# EAGLE board schemaPCB (EAGLE 9.7.0)
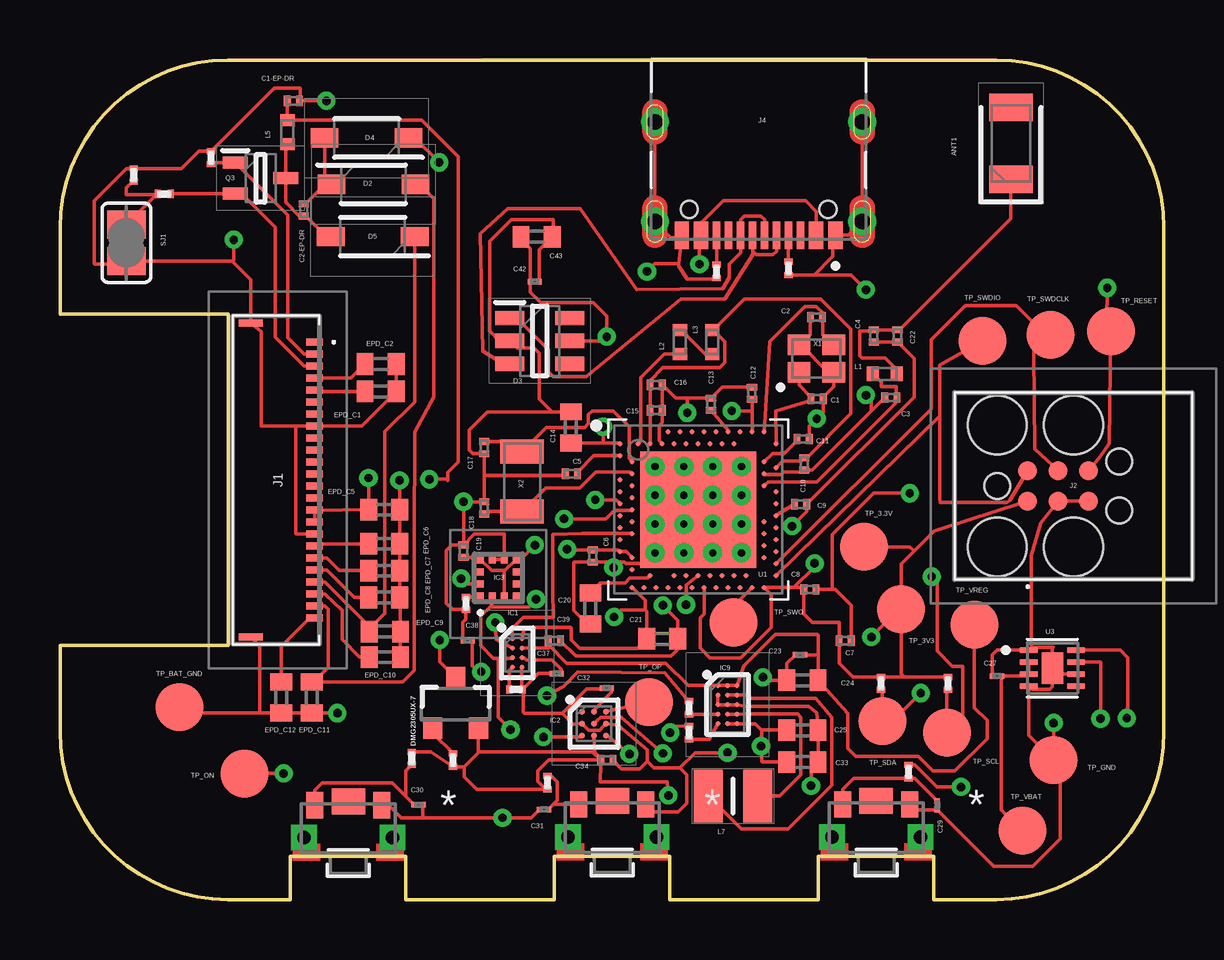
[diagram p0: board, top side]
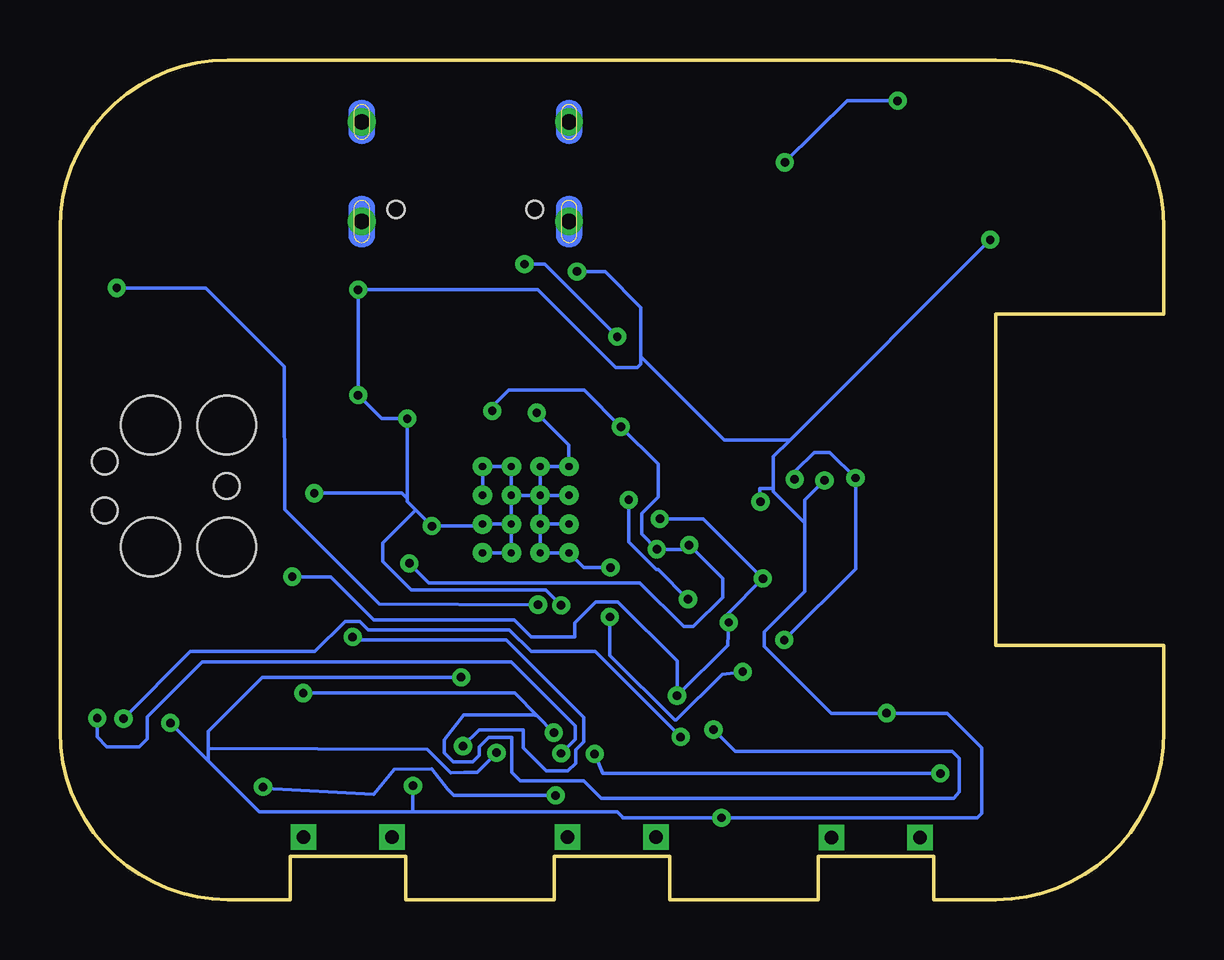
[diagram p1: board, bottom side, seen from below]

Size 46 x 35 mm. Coordinates in mm from the lower left corner, seen from the top.
Outline: 39,35 arc-90 46,28
Outline: 46,7 arc-90 39,0
Outline: 7,35 arc90 0,28
Outline: 0,7 arc90 7,0
Outline: 7,35 arc90 0,28
Outline: 0,28 0,24.4 7,24.4 7,10.6 0,10.6 0,7
Outline: 0,7 arc90 7,0
Outline: 7,0 9.6,0 9.6,1.8 14.4,1.8 14.4,0 20.6,0 20.6,1.8 25.4,1.8 25.4,0 31.6,0 31.6,1.8 36.4,1.8 36.4,0 39,0
Outline: 39,0 arc90 46,7
Outline: 46,7 46,28
Outline: 46,28 arc90 39,35
Outline: 39,35 7,35
Copper layers (1*16): Top 0.035mm / dielectric 1.5mm / Bottom 0.035mm
Design rules "Fusion Electronics Design Rules *": minimum track width 6mil, minimum drill 0.35mm, track to track 6mil, track to pad 6mil, pad to pad 6mil, via to via 6mil, smd to smd 6mil, copper to edge 40mil, drill to drill 6mil, minimum pad ring 10mil, minimum via ring 8mil, stop-mask expansion 4mil, vias tented up to drill 9999mil, thermal gap 10mil

## Footprints (pad centres in the part's own frame; a part is rotated, then mirrored left to right if it is on the bottom)
2450AT18B100E_ANTC3216X140N = smd 1.15 x 1.8: 1 -1.5,0; 2 1.5,0
NORDIC_NRF_3_RESC0201_L = smd 0.28 x 0.43: 1 -0.255,0; 2 0.255,0
ESP32_C6_LIBRARY_1_ESP32_WROVER_EAGLE-LTSPICE_C0402 = smd 0.7 x 0.9: 1 -0.65,0; 2 0.65,0
GRM011R60J152KE01L_2_CAPC0201X13N = smd 0.22 x 0.23: 1 -0.185,0; 2 0.185,0
ESP32_C6_LIBRARY_5_SOD3716X135N = smd 1.15 x 0.8: 1 -1.75,0; 2 1.75,0
ESP32_C6_LIBRARY_3_SOT95P280X145-6N = smd 1.2 x 0.6: 1 -1.25,0.95; 2 -1.25,0; 3 -1.25,-0.95; 4 1.25,-0.95; 5 1.25,0; 6 1.25,0.95
ESP32_C6_LIBRARY_4_ESP32_C6_LIBRARY_4_ESP32_C6_LIBRARY_4_ESP32_C6_LIBRARY_4_ESP32_WROVER_SPARKFUN-DISCRETESEMI_SOT23-3 = smd 0.8 x 0.9: 1 -0.95,-1; 2 0.95,-1; 3 0,1.1
BQ25180YBGR_BGA8C40P2X4_100X155X50 = smd 0.2 x 0.2: A1 -0.2,0.6; A2 0.2,0.6; B1 -0.2,0.2; B2 0.2,0.2; C1 -0.2,-0.2; C2 0.2,-0.2; D1 -0.2,-0.6; D2 0.2,-0.6
DRV2605YZFR_BGA9C50P3X3_144X144X62 = smd 0.25 x 0.25: A1 -0.5,0.5; A2 0,0.5; A3 0.5,0.5; B1 -0.5,0; B2 0,0; B3 0.5,0; C1 -0.5,-0.5; C2 0,-0.5; C3 0.5,-0.5
BMA423_BMA423 = smd 0.3 x 0.35: 1 -0.75,-0.775; 2 -0.25,-0.775; 3 0.25,-0.775; 4 0.75,-0.775; 7 0.75,0.775; 8 0.25,0.775; 9 -0.25,0.775; 10 -0.75,0.775 | smd 0.35 x 0.3: 5 0.775,-0.25; 6 0.775,0.25; 11 -0.775,0.25; 12 -0.775,-0.25
RT6160AWSC_BGA15C40P3X5_140X230X60 = smd 0.216 x 0.216: A1 -0.4,0.8; A2 0,0.8; A3 0.4,0.8; B1 -0.4,0.4; B2 0,0.4; B3 0.4,0.4; C1 -0.4,0; C2 0,0; C3 0.4,0; D1 -0.4,-0.4; D2 0,-0.4; D3 0.4,-0.4; E1 -0.4,-0.8; E2 0,-0.8; E3 0.4,-0.8
503480-2400_5034802400 = smd 0.3 x 0.7: 1 -5.75,1.525; 2 -5.25,1.525; 3 -4.75,1.525; 4 -4.25,1.525; 5 -3.75,1.525; 6 -3.25,1.525; 7 -2.75,1.525; 8 -2.25,1.525; 9 -1.75,1.525; 10 -1.25,1.525; 11 -0.75,1.525; 12 -0.25,1.525; 13 0.25,1.525; 14 0.75,1.525; 15 1.25,1.525; 16 1.75,1.525; 17 2.25,1.525; 18 2.75,1.525; 19 3.25,1.525; 20 3.75,1.525; 21 4.25,1.525; 22 4.75,1.525; 23 5.25,1.525; 24 5.75,1.525 | smd 0.3 x 1: MP1 -6.54,-1.125; MP2 6.54,-1.125
TC2030-IDC_TC2030IDC = smd 0.783 x 0.783: 1 -0.953,-0.635; 2 -0.953,0.635; 3 0.317,-0.635; 4 0.317,0.635; 5 1.588,-0.635; 6 1.588,0.635 | hole 2.451: -2.223,-2.54; -2.223,2.54; 0.952,-2.54; 0.952,2.54 | hole 1.067: -2.223,0; 2.857,-1.016; 2.857,1.016
KH-TYPE-C-16P_KINGHELM_KH-TYPE-C-16P = smd 0.6 x 1.15: A1_B12 -3.2,4.725; A4_B9 -2.4,4.725; A9_B4 2.4,4.725; A12_B1 3.2,4.725 | smd 0.3 x 1.15: A5 -1.25,4.725; A6 -0.25,4.725; A7 0.25,4.725; A8 1.25,4.725; B5 1.75,4.725; B6 0.75,4.725; B7 -0.75,4.725; B8 -1.75,4.725 | drill 0.65 pad 1.05: SH1 -4.32,0; SH2 4.32,0; SH3 -4.32,4.15; SH4 4.32,4.15 | hole 0.7: -2.89,3.65; 2.89,3.65
NORDIC_NRF_2_RESC0402_L = smd 0.5 x 0.6: 1 -0.5,0; 2 0.5,0
MLP2016SR47MT0S1_INDC2016X100N = smd 1.2 x 2.2: 1 -1.028,0; 2 1.028,0
ESP32_C6_LIBRARY_6_SOT65P210X110-3N = smd 1.05 x 0.5: 1 -1.05,0.65; 2 -1.05,-0.65; 3 1.05,0
ERA-1AEB3401C_0201 = smd 0.35 x 0.25: 1 0,0.275; 2 0,-0.275
CPF0201D7K68C1_0201 = smd 0.35 x 0.25: 1 0,0.275; 2 0,-0.275
ESP32_C6_LIBRARY_7_JUMPER_SJ = smd 1.168 x 1.6: 1 -0.762,0; 2 0.762,0
2025-10-22_07-23-44_LIBRARY_SW_EVP-AKE31A_PAN = smd 0.711 x 1.092: 1 -1.4,-0.972; 2 1.4,-0.972 | drill 0.559 pad 0.914 square: 3 -1.848,0.381; 4 1.848,0.381 | smd 1.397 x 1.092: 5 0,-1.124
HECTOR_WATCH_1_TP20R = smd 2 x 2: TP 0,0
NORDIC_NRF_4_AQFN50P700X700X85_HS-74N = smd 4.85 x 4.85: P$74 0,0 | drill 0.3 pad 0.6: P$75 -1.8,1.8; P$76 -0.6,1.8; P$77 0.6,1.8; P$78 1.8,1.8; P$79 -1.8,0.6; P$80 -0.6,0.6; P$81 0.6,0.6; P$82 1.8,0.6; P$83 -1.8,-0.6; P$84 -0.6,-0.6; P$85 0.6,-0.6; P$86 1.8,-0.6; P$87 -1.8,-1.8; P$88 -0.6,-1.8; P$89 0.6,-1.8; P$90 1.8,-1.8 | smd 0.2 x 0.2: P$A8 -1.25,3.25; P$A10 -0.75,3.25; P$A12 -0.25,3.25; P$A14 0.25,3.25; P$A16 0.75,3.25; P$A18 1.25,3.25; P$A20 1.75,3.25; P$A22 2.25,3.25; P$A23 2.75,3.25; P$AA24 3.25,-2.25; P$AB2 -2.75,-2.5; P$AC5 -2,-2.75; P$AC9 -1,-2.75; P$AC11 -0.5,-2.75; P$AC13 0,-2.75; P$AC15 0.5,-2.75; P$AC17 1,-2.75; P$AC19 1.5,-2.75; P$AC21 2,-2.75; P$AC24 3.25,-2.75; P$AD2 -2.75,-3.25; P$AD4 -2.25,-3.25; P$AD6 -1.75,-3.25; P$AD8 -1.25,-3.25; P$AD10 -0.75,-3.25; P$AD12 -0.25,-3.25; P$AD14 0.25,-3.25; P$AD16 0.75,-3.25; P$AD18 1.25,-3.25; P$AD20 1.75,-3.25; P$AD22 2.25,-3.25; P$AD23 2.75,-3.25; P$B1 -3.25,2.75; P$B3 -2.5,2.75; P$B5 -2,2.75; P$B7 -1.5,2.75; P$B9 -1,2.75; P$B11 -0.5,2.75; P$B13 0,2.75; P$B15 0.5,2.75; P$B17 1,2.75; P$B19 1.5,2.75; P$B24 3.25,2.75; P$C1 -3.25,2.25; P$D2 -2.75,2; P$D23 2.75,2; P$E24 3.25,1.75; P$F2 -2.75,1.5; P$F23 2.75,1.5; P$G1 -3.25,1.25; P$H2 -2.75,1; P$H23 2.75,1; P$J1 -3.25,0.75; P$J24 3.25,0.75; P$K2 -2.75,0.5; P$L1 -3.25,0.25; P$L24 3.25,0.25; P$M2 -2.75,0; P$N1 -3.25,-0.25; P$N24 3.25,-0.25; P$P2 -2.75,-0.5; P$P23 2.75,-0.5; P$R1 -3.25,-0.75; P$R24 3.25,-0.75; P$T2 -2.75,-1; P$T23 2.75,-1; P$U1 -3.25,-1.25; P$U24 3.25,-1.25; P$V23 2.75,-1.5; P$W1 -3.25,-1.75; P$W24 3.25,-1.75; P$Y2 -2.75,-2; P$Y23 2.75,-2
ESP32_C6_LIBRARY_SON50P200X200X80-9N = smd 0.76 x 0.27: 1 -0.985,0.75; 2 -0.985,0.25; 3 -0.985,-0.25; 4 -0.985,-0.75; 5 0.985,-0.75; 6 0.985,-0.25; 7 0.985,0.25; 8 0.985,0.75 | smd 0.9 x 1.3: 9 0,0
NORDIC_NRF_BT-XTAL_2016_N = smd 0.95 x 0.85: 1 -0.725,-0.575; 2 0.725,-0.575; 3 0.725,0.575; 4 -0.725,0.575
NORDIC_NRF_1_XTAL_3215_N = smd 1 x 1.8: 1 -1.25,0; 2 1.25,0

## Placement (x,y rotation side)
ANT1  2450AT18B100E  [2450AT18B100E_ANTC3216X140N]  39.62,31.52 90 top
C1  12pF  [NORDIC_NRF_3_RESC0201_L]  31.55,20.87 0 top
C1-EP-DR  10uF  [NORDIC_NRF_3_RESC0201_L]  9.73,33.3 0 top
C2  12pF  [NORDIC_NRF_3_RESC0201_L]  31.52,24.28 180 top
C2-EP-DR  4.7uF/25V  [NORDIC_NRF_3_RESC0201_L]  10.16,28.75 270 top
C3  1pF  [NORDIC_NRF_3_RESC0201_L]  34.62,20.93 180 top
C4  1pF  [NORDIC_NRF_3_RESC0201_L]  33.91,23.49 270 top
C5  100nF  [NORDIC_NRF_3_RESC0201_L]  21.31,17.75 180 top
C6  4.7µF  [NORDIC_NRF_3_RESC0201_L]  22.2,14.32 270 top
C7  100nF  [NORDIC_NRF_3_RESC0201_L]  32.71,10.79 0 top
C8  100nF  [NORDIC_NRF_3_RESC0201_L]  31.24,12.92 0 top
C9  820pF  [NORDIC_NRF_3_RESC0201_L]  30.86,16.48 0 top
C10  N.C.  [NORDIC_NRF_3_RESC0201_L]  31.01,18.16 270 top
C11  100pF  [NORDIC_NRF_3_RESC0201_L]  30.96,19.2 0 top
C12  100nF  [NORDIC_NRF_3_RESC0201_L]  28.83,21.1 90 top
C13  N.C.  [NORDIC_NRF_3_RESC0201_L]  27.13,20.65 90 top
C14  4.7µF  [ESP32_C6_LIBRARY_1_ESP32_WROVER_EAGLE-LTSPICE_C0402]  21.28,19.68 90 top
C15  1.0µF  [NORDIC_NRF_3_RESC0201_L]  24.84,20.39 0 top
C16  47nF  [NORDIC_NRF_3_RESC0201_L]  24.84,21.46 0 top
C17  12pF  [NORDIC_NRF_3_RESC0201_L]  17.68,18.84 90 top
C18  12pF  [NORDIC_NRF_3_RESC0201_L]  17.68,16.33 90 top
C19  100nF  [NORDIC_NRF_3_RESC0201_L]  16.81,14.52 90 top
C20  4.7µF  [ESP32_C6_LIBRARY_1_ESP32_WROVER_EAGLE-LTSPICE_C0402]  22.1,12.14 270 top
C21  4.7µF  [ESP32_C6_LIBRARY_1_ESP32_WROVER_EAGLE-LTSPICE_C0402]  25.09,10.87 0 top
C22  N.C.  [NORDIC_NRF_3_RESC0201_L]  34.9,23.49 270 top
C23  0.1uF  [GRM011R60J152KE01L_2_CAPC0201X13N]  30.83,10.21 180 top
C24  10uF  [ESP32_C6_LIBRARY_1_ESP32_WROVER_EAGLE-LTSPICE_C0402]  30.94,9.14 0 top
C25  22uF  [ESP32_C6_LIBRARY_1_ESP32_WROVER_EAGLE-LTSPICE_C0402]  30.94,7.06 0 top
C27  0.1uF  [GRM011R60J152KE01L_2_CAPC0201X13N]  39.04,9.32 0 top
C29  1uF  [GRM011R60J152KE01L_2_CAPC0201X13N]  36.55,3.93 90 top
C30  1uF  [GRM011R60J152KE01L_2_CAPC0201X13N]  14.93,3.96 180 top
C31  1uF  [GRM011R60J152KE01L_2_CAPC0201X13N]  20.17,3.76 0 top
C32  1uF  [GRM011R60J152KE01L_2_CAPC0201X13N]  22.78,8.81 0 top
C33  22uF  [ESP32_C6_LIBRARY_1_ESP32_WROVER_EAGLE-LTSPICE_C0402]  30.94,5.74 0 top
C34  0.1uF  [NORDIC_NRF_3_RESC0201_L]  22.78,5.81 0 top
C37  1uF  [GRM011R60J152KE01L_2_CAPC0201X13N]  20.7,9.42 0 top
C38  1uF  [GRM011R60J152KE01L_2_CAPC0201X13N]  16.99,10.79 0 top
C39  10uF  [NORDIC_NRF_3_RESC0201_L]  20.6,10.79 0 top
C42  0.1uF  [GRM011R60J152KE01L_2_CAPC0201X13N]  19.79,25.75 0 top
C43  4.7uF  [ESP32_C6_LIBRARY_1_ESP32_WROVER_EAGLE-LTSPICE_C0402]  19.86,27.63 0 top
D2  ESP32_C6_LIBRARY_5_MBR0530  [ESP32_C6_LIBRARY_5_SOD3716X135N]  13.05,29.82 0 top
D3  USBLC6-2SC6Y  [ESP32_C6_LIBRARY_3_SOT95P280X145-6N]  19.99,23.29 0 top
D4  ESP32_C6_LIBRARY_5_MBR0530  [ESP32_C6_LIBRARY_5_SOD3716X135N]  12.78,31.75 180 top
D5  ESP32_C6_LIBRARY_5_MBR0530  [ESP32_C6_LIBRARY_5_SOD3716X135N]  13.03,27.63 180 top
DMG2305UX-7  20V/4.2A/52mΩ/1.4W  [ESP32_C6_LIBRARY_4_ESP32_C6_LIBRARY_4_ESP32_C6_LIBRARY_4_ESP32_C6_LIBRARY_4_ESP32_WROVER_SPARKFUN-DISCRETESEMI_SOT23-3]  16.48,8.15 0 top
EPD_C1  1uF/50V  [ESP32_C6_LIBRARY_1_ESP32_WROVER_EAGLE-LTSPICE_C0402]  13.36,21.18 180 top
EPD_C2  1uF/50V  [ESP32_C6_LIBRARY_1_ESP32_WROVER_EAGLE-LTSPICE_C0402]  13.36,22.32 180 top
EPD_C5  0.1uF/50V  [ESP32_C6_LIBRARY_1_ESP32_WROVER_EAGLE-LTSPICE_C0402]  13.51,16.25 180 top
EPD_C6  1uF/50V  [ESP32_C6_LIBRARY_1_ESP32_WROVER_EAGLE-LTSPICE_C0402]  13.51,14.83 180 top
EPD_C7  1uF/50V  [ESP32_C6_LIBRARY_1_ESP32_WROVER_EAGLE-LTSPICE_C0402]  13.51,13.71 180 top
EPD_C8  1uF/50V  [ESP32_C6_LIBRARY_1_ESP32_WROVER_EAGLE-LTSPICE_C0402]  13.51,12.59 180 top
EPD_C9  1uF/50V  [ESP32_C6_LIBRARY_1_ESP32_WROVER_EAGLE-LTSPICE_C0402]  13.54,11.17 180 top
EPD_C10  1uF/50V  [ESP32_C6_LIBRARY_1_ESP32_WROVER_EAGLE-LTSPICE_C0402]  13.54,10.11 180 top
EPD_C11  1uF/50V  [ESP32_C6_LIBRARY_1_ESP32_WROVER_EAGLE-LTSPICE_C0402]  10.49,8.43 90 top
EPD_C12  1uF/50V  [ESP32_C6_LIBRARY_1_ESP32_WROVER_EAGLE-LTSPICE_C0402]  9.22,8.43 90 top
IC1  BQ25180YBGR  [BQ25180YBGR_BGA8C40P2X4_100X155X50]  19.05,10.28 0 top
IC2  DRV2605YZFR  [DRV2605YZFR_BGA9C50P3X3_144X144X62]  22.25,7.34 0 top
IC3  BMA421  [BMA423_BMA423]  18.26,13.41 0 top
IC9  RT6160AWSC  [RT6160AWSC_BGA15C40P3X5_140X230X60]  27.81,8.12 0 top
J1  503480-2400  [503480-2400_5034802400]  9.08,17.49 270 top
J2  TC2030-IDC  [TC2030-IDC_TC2030IDC]  41.27,17.24 0 top
J4  KH-TYPE-C-16P  [KH-TYPE-C-16P_KINGHELM_KH-TYPE-C-16P]  29.11,32.42 180 top
L1  3.9nH  [NORDIC_NRF_2_RESC0402_L]  34.37,21.92 0 top
L2  10µH  [NORDIC_NRF_2_RESC0402_L]  25.83,23.24 90 top
L3  15nH  [NORDIC_NRF_2_RESC0402_L]  27.18,23.24 90 top
L5  68uH  [NORDIC_NRF_2_RESC0402_L]  9.47,32 270 top
L7  FTC252012SR47MBCA  [MLP2016SR47MT0S1_INDC2016X100N]  28.04,4.31 0 top
Q3  SI1308EDL-T1-GE3  [ESP32_C6_LIBRARY_6_SOT65P210X110-3N]  8.36,30.07 0 top
R1_EP_DR  0.47  [ERA-1AEB3401C_0201]  4.34,29.41 90 top
R1_USB  5K1  [CPF0201D7K68C1_0201]  30.35,26.31 180 top
R2  0  [CPF0201D7K68C1_0201]  26.21,6.96 0 top
R2_EP_DR  10K  [ERA-1AEB3401C_0201]  6.3,30.93 0 top
R2_USB  5K1  [ERA-1AEB3401C_0201]  27.35,26.18 0 top
R3  0  [ERA-1AEB3401C_0201]  16.92,12.34 180 top
R4  0  [CPF0201D7K68C1_0201]  26.21,8 0 top
R5  10k  [CPF0201D7K68C1_0201]  14.65,5.89 180 top
R7  10k  [CPF0201D7K68C1_0201]  35.36,5.33 180 top
R8  10k  [CPF0201D7K68C1_0201]  20.32,4.87 0 top
R9  10K  [ERA-1AEB3401C_0201]  19,8.76 270 top
R17  3K3  [CPF0201D7K68C1_0201]  37.01,9.01 0 top
R18  3K3  [CPF0201D7K68C1_0201]  34.21,9.01 0 top
R_PWR_EPD  10K  [CPF0201D7K68C1_0201]  16.38,5.81 0 top
R_TYPE_SEL  2.2  [ERA-1AEB3401C_0201]  3.07,30.2 0 top
SJ1  [ESP32_C6_LIBRARY_7_JUMPER_SJ]  2.77,27.38 90 top
SW_DN  2025-10-22_07-23-44_LIBRARY_EVP-AKE31ASW_EVP-AKE31A_PAN  [2025-10-22_07-23-44_LIBRARY_SW_EVP-AKE31A_PAN]  34.01,2.99 180 top
SW_ENT  2025-10-22_07-23-44_LIBRARY_EVP-AKE31ASW_EVP-AKE31A_PAN  [2025-10-22_07-23-44_LIBRARY_SW_EVP-AKE31A_PAN]  23.01,2.99 180 top
SW_UP  2025-10-22_07-23-44_LIBRARY_EVP-AKE31ASW_EVP-AKE31A_PAN  [2025-10-22_07-23-44_LIBRARY_SW_EVP-AKE31A_PAN]  12.01,2.97 180 top
TP_3.3V  HECTOR_WATCH_1_TPTP20R  [HECTOR_WATCH_1_TP20R]  33.5,14.7 0 top
TP_3V3  HECTOR_WATCH_1_TPTP20R  [HECTOR_WATCH_1_TP20R]  35.05,12.11 0 top
TP_BAT_GND  HECTOR_WATCH_1_TPTP20R  [HECTOR_WATCH_1_TP20R]  4.98,8.02 0 top
TP_GND  HECTOR_WATCH_1_TPTP20R  [HECTOR_WATCH_1_TP20R]  41.4,5.81 0 top
TP_ON  HECTOR_WATCH_1_TPTP20R  [HECTOR_WATCH_1_TP20R]  7.7,5.25 0 top
TP_OP  HECTOR_WATCH_1_TPTP20R  [HECTOR_WATCH_1_TP20R]  24.54,8.23 0 top
TP_RESET  HECTOR_WATCH_1_TPTP20R  [HECTOR_WATCH_1_TP20R]  43.79,23.69 0 top
TP_SCL  HECTOR_WATCH_1_TPTP20R  [HECTOR_WATCH_1_TP20R]  36.96,6.96 0 top
TP_SDA  HECTOR_WATCH_1_TPTP20R  [HECTOR_WATCH_1_TP20R]  34.26,7.44 0 top
TP_SWDCLK  HECTOR_WATCH_1_TPTP20R  [HECTOR_WATCH_1_TP20R]  41.27,23.54 0 top
TP_SWDIO  HECTOR_WATCH_1_TPTP20R  [HECTOR_WATCH_1_TP20R]  38.43,23.29 0 top
TP_SWO  HECTOR_WATCH_1_TPTP20R  [HECTOR_WATCH_1_TP20R]  28.07,11.55 0 top
TP_VBAT  HECTOR_WATCH_1_TPTP20R  [HECTOR_WATCH_1_TP20R]  40.11,2.87 0 top
TP_VREG  HECTOR_WATCH_1_TPTP20R  [HECTOR_WATCH_1_TP20R]  38.1,11.45 0 top
U1  NRF52840_QF  [NORDIC_NRF_4_AQFN50P700X700X85_HS-74N]  26.59,16.25 0 top
U3  MAX17048G+T10  [ESP32_C6_LIBRARY_SON50P200X200X80-9N]  41.35,9.65 0 top
X1  32MHz  [NORDIC_NRF_BT-XTAL_2016_N]  31.52,22.55 0 top
X2  32.768kHz  [NORDIC_NRF_1_XTAL_3215_N]  19.25,17.42 90 top

## Library data of the parts
ANT1 = InkTime_v5 (1); ARROW_PART_NUMBER: 2450AT18B100E; ARROW_PRICE-STOCK: https://www.arrow.com/en/products/2450at18b100e/johanson-dielectrics?utm_currency=USD&region=nac; DESCRIPTION: Antennas 2.45GHz ANTENNA; HEIGHT: 1.4mm; MANUFACTURER_NAME: JOHANSON TECHNOLOGY; MANUFACTURER_PART_NUMBER: 2450AT18B100E; MOUSER_PART_NUMBER: 609-2450AT18B100E; MOUSER_PRICE-STOCK: https://www.mouser.co.uk/ProductDetail/Johanson-Technology/2450AT18B100E?qs=yCnrNFeXz%252Bh5MFsFIXGZGA%3D%3D
C1 C1-EP-DR C2 C2-EP-DR C3-C13 C15-C19 C22 C34 C39 L1-L3 L5 R1_EP_DR R1_USB R2 R2_EP_DR R2_USB R3-R5 R7-R9 R17 R18 R_PWR_EPD R_TYPE_SEL SJ1 TP_3.3V TP_3V3 TP_BAT_GND TP_GND TP_ON TP_OP TP_RESET TP_SCL TP_SDA TP_SWDCLK TP_SWDIO TP_SWO TP_VBAT TP_VREG U1 X1 X2 = InkTime_v5 (1)
C14 C20 C21 C24 C25 C33 C43 EPD_C1 EPD_C2 EPD_C5-EPD_C12 = InkTime_v5 (1); SPICEMODEL: NONE; SPICEPREFIX: C
C23 C27 C29-C32 C37 C38 C42 = InkTime_v5 (1); AVAILABILITY: In Stock; CHECK_PRICES: https://www.snapeda.com/parts/GRM011R60J152KE01L/Murata/view-part/?ref=eda; DESCRIPTION: SMD Capacitor X5R(EIA) with Capacitance: 1500pF Tol. 10%. Rated Voltage: 6.3Vdc; MF: Murata; MP: GRM011R60J152KE01L; PACKAGE: 0201 Murata; PRICE: None; SNAPEDA_LINK: https://www.snapeda.com/parts/GRM011R60J152KE01L/Murata/view-part/?ref=snap
D2 D4 D5 = InkTime_v5 (1); AVAILABILITY: In Stock; CHECK_PRICES: https://www.snapeda.com/parts/MBR0530/Onsemi/view-part/?ref=eda; DESCRIPTION: Diode Schottky 30 V 500mA Surface Mount SOD-123; MF: ON Semiconductor; MP: MBR0530; PACKAGE: SOD-123-2 ON Semiconductor; PRICE: None; PURCHASE-URL: https://www.snapeda.com/api/url_track_click_mouser/?unipart_id=179458&manufacturer=ON Semiconductor&part_name=MBR0530&search_term=None; SNAPEDA_LINK: https://www.snapeda.com/parts/MBR0530/Onsemi/view-part/?ref=snap
D3 = InkTime_v5 (1); AVAILABILITY: In Stock; CHECK_PRICES: https://www.snapeda.com/parts/USBLC6-2SC6Y/STMicroelectronics/view-part/?ref=eda; DESCRIPTION: 17V Clamp 5A (8/20µs) Ipp Tvs Diode Surface Mount SOT-23-6; MF: STMicroelectronics; MP: USBLC6-2SC6Y; PACKAGE: SOT-23-6 STMicroelectronics; PRICE: None; SNAPEDA_LINK: https://www.snapeda.com/parts/USBLC6-2SC6Y/STMicroelectronics/view-part/?ref=snap
DMG2305UX-7 = InkTime_v5 (1); PROD_ID: TRAN-14388
IC1 = InkTime_v5 (1); ARROW_PART_NUMBER: BQ25180YBGR; ARROW_PRICE-STOCK: https://www.arrow.com/en/products/bq25180ybgr/texas-instruments?utm_currency=USD&region=nac; DESCRIPTION: Charger IC Lithium Ion/Polymer, Lithium Iron Phosphate 8-DSBGA (1.6x1.1); HEIGHT: 0.5mm; MANUFACTURER_NAME: Texas Instruments; MANUFACTURER_PART_NUMBER: BQ25180YBGR; MOUSER_PART_NUMBER: 595-BQ25180YBGR; MOUSER_PRICE-STOCK: https://www.mouser.co.uk/ProductDetail/Texas-Instruments/BQ25180YBGR?qs=doiCPypUmgEWjAK%252BJAX6Tw%3D%3D
IC2 = InkTime_v5 (1); ARROW_PART_NUMBER: DRV2605YZFR; ARROW_PRICE-STOCK: https://www.arrow.com/en/products/drv2605yzfr/texas-instruments?region=nac; DESCRIPTION: Haptic Driver for ERM/LRA with Built-In Library and Smart Loop Architecture; HEIGHT: 0.625mm; MANUFACTURER_NAME: Texas Instruments; MANUFACTURER_PART_NUMBER: DRV2605YZFR
IC3 = InkTime_v5 (1); ARROW_PART_NUMBER: BMA423; ARROW_PRICE-STOCK: https://www.arrow.com/en/products/bma423/bosch; DESCRIPTION: Accelerometers Triaxial low-g 12bit Acceleration Sensor; HEIGHT: 1mm; MANUFACTURER_NAME: BOSCH; MANUFACTURER_PART_NUMBER: BMA423; MOUSER_PART_NUMBER: 262-BMA423; MOUSER_PRICE-STOCK: https://www.mouser.co.uk/ProductDetail/Bosch-Sensortec/BMA423?qs=HXFqYaX1Q2xC%252BSgeGoX3mg%3D%3D
IC9 = InkTime_v5 (1); DESCRIPTION: Buck-Boost Regulator Positive Output Step-Up/Step-Down I2C DC-DC Controller IC 15-WL-CSP (BSC) (1.4x2.3); HEIGHT: 0.6mm; MANUFACTURER_NAME: RICHTEK; MANUFACTURER_PART_NUMBER: RT6160AWSC; MOUSER_PART_NUMBER: 835-RT6160AWSC; MOUSER_PRICE-STOCK: https://www.mouser.co.uk/ProductDetail/Richtek/RT6160AWSC?qs=amGC7iS6iy%2FLd9PSoixZXQ%3D%3D
J1 = InkTime_v5 (1); DESCRIPTION: FFC & FPC Connectors 0.5mm FPC RA SMT Dual Contact 24Ckt; HEIGHT: 1.87mm; MANUFACTURER_NAME: Molex; MANUFACTURER_PART_NUMBER: 503480-2400; MOUSER_PART_NUMBER: 538-503480-2400; MOUSER_PRICE-STOCK: https://www.mouser.co.uk/ProductDetail/Molex/503480-2400?qs=OAhjpuo3Vu7efIoxFh9AOw%3D%3D
J2 = InkTime_v5 (1); DESCRIPTION: CABLE ADAPTER 6 POS; HEIGHT: 19mm; MANUFACTURER_NAME: Tag Connect; MANUFACTURER_PART_NUMBER: TC2030-IDC
J4 = InkTime_v5 (1); AVAILABILITY: Not in stock; CHECK_PRICES: https://www.snapeda.com/parts/KH-TYPE-C-16P/Kinghelm/view-part/?ref=eda; MF: kinghelm; MP: KH-TYPE-C-16P; PACKAGE: None; PRICE: None; SNAPEDA_LINK: https://www.snapeda.com/parts/KH-TYPE-C-16P/Kinghelm/view-part/?ref=snap
L7 = InkTime_v5 (1); DESCRIPTION: SMD / SMT Inductors (Coils), L=0.47?H, L x W x T :; HEIGHT: 1mm; JLCPCB: https://jlcpcb.com/partdetail/6763488-FTC252012SR47MBCA/C5832368; MANUFACTURER_NAME: TDK; MANUFACTURER_PART_NUMBER: FTC252012SR47MBCA
Q3 = InkTime_v5 (1); AVAILABILITY: In Stock; CHECK_PRICES: https://www.snapeda.com/parts/SI1308EDL-T1-GE3/Vishay+Siliconix/view-part/?ref=eda; DESCRIPTION: Si1308EDL-T1-GE3 N-channel MOSFET Transistor, 1.5 A, 30 V, 3-Pin SC-70 | Siliconix / Vishay SI1308EDL-T1-GE3; MF: Vishay Siliconix; MP: SI1308EDL-T1-GE3; PACKAGE: SOT-323 Vishay Semiconductor; PRICE: None; PURCHASE-URL: https://www.snapeda.com/api/url_track_click_mouser/?unipart_id=274603&manufacturer=Vishay Siliconix&part_name=SI1308EDL-T1-GE3&search_term=None; SNAPEDA_LINK: https://www.snapeda.com/parts/SI1308EDL-T1-GE3/Vishay+Siliconix/view-part/?ref=snap
SW_DN SW_ENT SW_UP = InkTime_v5 (1); COPYRIGHT: Copyright (C) 2025 Ultra Librarian. All rights reserved.; DIGI-KEY_PART_NUMBER_1: P123437TR-ND; DIGI-KEY_PART_NUMBER_2: P123437CT-ND; DIGI-KEY_PART_NUMBER_3: P123437DKR-ND; MANUFACTURER_NAME: Panasonic; MANUFACTURER_PART_NUMBER: EVP-AKE31A
U3 = InkTime_v5 (1); AVAILABILITY: In Stock; CHECK_PRICES: https://www.snapeda.com/parts/MAX17048G+T10/Analog+Devices/view-part/?ref=eda; DESCRIPTION: 3µA 1-Cell/2-Cell Fuel Gauge with ModelGauge; MF: Analog Devices; MP: MAX17048G+T10; PACKAGE: TDFN-8 Maxim; PRICE: None; PURCHASE-URL: https://www.snapeda.com/api/url_track_click_mouser/?unipart_id=329239&manufacturer=Analog Devices&part_name=MAX17048G+T10&search_term=None; SNAPEDA_LINK: https://www.snapeda.com/parts/MAX17048G+T10/Analog+Devices/view-part/?ref=snap

## Nets
3V3/1.7D: C34.1 DMG2305UX-7.2 IC2.C2 R5.2 R7.2 R8.2 R_PWR_EPD.2
3V3/2.4A: C6.1 C7.1 C8.1 C12.1 C14.1 C19.1 C25.1 C33.1 IC3.3 IC3.7 IC3.10 IC9.E2 IC9.E3 J2.1 R17.1 R18.1 TP_3.3V.TP TP_3V3.TP U1.P$A22 U1.P$AD14 U1.P$AD23 U1.P$B1 U1.P$W1 U1.P$Y2
ALERT/1.6C: U3.5
ALERT/2.5C: U1.P$J24
D+/1.5D: D3.4
D+/2.7D: U1.P$AD6
D-/1.5D: D3.6
D-/2.7D: U1.P$AD4
DN: D3.1 J4.A7 J4.B7
DP: D3.3 J4.A6 J4.B6
EPD_3V3: C1-EP-DR.1 DMG2305UX-7.3 EPD_C5.2 J1.15 J1.16 L5.1
EPD_BUSY/1.5D: J1.9
EPD_BUSY/2.2D: U1.P$AD12
EPD_CS/1.4C: J1.12
EPD_CS/2.2D: U1.P$K2
EPD_DC/1.5D: J1.11
EPD_DC/2.2D: U1.P$AD10
EPD_RST/1.5D: J1.10
EPD_RST/2.2D: U1.P$AC11
GDR: J1.2 Q3.1 R2_EP_DR.2
GND: C1-EP-DR.2 C1.2 C2.2 C3.2 C4.2 C5.2 C6.2 C7.2 C8.2 C9.2 C10.2 C11.2 C12.2 C13.2 C14.2 C15.2 C16.2 C17.1 C18.2 C19.2 C20.2 C21.2 C22.2 C23.2 C24.1 C25.2 C27.1 C29.1 C30.1 C31.1 C32.1 C33.2 C34.2 C37.1 C38.1 C39.2 C42.2 C43.2 D3.2 D4.1 EPD_C1.1 EPD_C2.1 EPD_C5.1 EPD_C6.1 EPD_C7.1 EPD_C8.1 EPD_C9.1 EPD_C10.1 EPD_C11.1 EPD_C12.1 IC1.D2 IC2.B1 IC2.B3 IC3.8 IC3.9 IC9.B1 IC9.C1 IC9.C2 IC9.C3 J1.8 J1.17 J1.MP1 J1.MP2 J2.3 J2.5 J4.A1_B12 J4.A12_B1 J4.SH1 J4.SH2 J4.SH3 J4.SH4 R1_USB.1 R2_EP_DR.1 R2_USB.2 R3.1 R9.1 R_TYPE_SEL.1 SJ1.1 SW_DN.1 SW_ENT.1 SW_UP.1 TP_BAT_GND.TP TP_GND.TP U1.P$74 U1.P$75 U1.P$76 U1.P$77 U1.P$78 U1.P$79 U1.P$80 U1.P$81 U1.P$82 U1.P$83 U1.P$84 U1.P$85 U1.P$86 U1.P$87 U1.P$88 U1.P$89 U1.P$90 U1.P$B7 U1.P$F23 U3.1 U3.4 U3.6 U3.9 X1.2 X1.4
HAPTIC_EN/1.4C: IC2.A1
HAPTIC_EN/2.6A: U1.P$U1
IMU_INT1: U1.P$N1
IMU_INT2: U1.P$P2
JJ: C10.1 C15.1 C16.1 L3.2 U1.P$B5 U1.P$E24
LX1: IC9.B2 IC9.B3 L7.1
LX2: IC9.D2 IC9.D3 L7.2
MOSI/1.5B: J1.14
MOSI/2.2D: U1.P$B13
MU_INT1: IC3.5
MU_INT2: IC3.6
N$1: IC1.D1 R9.2
N$2: IC9.D1 R4.2
N$3: IC9.E1 R2.2
N$4: IC3.1 R3.2
N$5: C20.1 U1.P$AC5
N$6: C18.1 U1.P$F2 X2.1
N$7: C17.2 U1.P$D2 X2.2
N$8: C5.1 U1.P$C1
N$9: C9.1 U1.P$N24
N$10: L2.1 U1.P$B3
N$11: L2.2 L3.1
N$12: C3.1 L1.1 U1.P$H23
N$13: ANT1.1 C4.1 C22.1 L1.2
N$14: C11.1 U1.P$D23
N$15: C2.1 U1.P$A23 X1.3
N$16: C1.1 U1.P$B24 X1.1
N$18: C2-EP-DR.1 D2.1 D4.2
N$19: R1_EP_DR.1 R_TYPE_SEL.2 SJ1.2
N$20: C2-EP-DR.2 D5.2 L5.2 Q3.3
N$22: C13.1 U1.P$A18
N$23: C32.2 IC2.A2
N$24: EPD_C2.2 J1.4
N$25: EPD_C1.2 J1.5
N$28: EPD_C6.2 J1.18
N$29: EPD_C7.2 J1.19
N$30: EPD_C8.2 J1.20
N$31: J4.A5 R1_USB.2
N$32: EPD_C10.2 J1.22
N$34: EPD_C12.2 J1.24
N$35: J4.B5 R2_USB.1
OUT+: IC2.A3 TP_OP.TP
OUT-: IC2.C3 TP_ON.TP
P0.04: U1.P$J1
P0.09: U1.P$L24
P0.13/1.5D: C30.2 R5.1 SW_UP.2
P0.13/2.6C: U1.P$AD8
P0.14/1.5D: C31.2 R8.1 SW_ENT.2
P0.14/2.7C: U1.P$AC9
P0.19: U1.P$AC15
P0.20: U1.P$AD16
P0.21: U1.P$AC17
P0.22: U1.P$AD18
P0.23: U1.P$AC19
P0.24: U1.P$AD20
P0.25: U1.P$AC21
P0.26: U1.P$G1
P0.27: U1.P$H2
P0.28: U1.P$B11
P0.29: U1.P$A10
P0.30: U1.P$B9
P0.31: U1.P$A8
P1.01/1.6C: DMG2305UX-7.1 R_PWR_EPD.1
P1.01/2.4B: U1.P$Y23
P1.02/1.6C: C29.2 R7.1 SW_DN.2
P1.02/2.8C: U1.P$W24
P1.03: U1.P$V23
P1.04: U1.P$U24
P1.05: U1.P$T23
P1.06: U1.P$R24
P1.07: U1.P$P23
P1.09: U1.P$R1
P1.10: U1.P$A20
P1.11: U1.P$B19
P1.12: U1.P$B17
P1.13: U1.P$A16
P1.14: U1.P$B15
P1.15: U1.P$A14
PMIC_INT: IC1.A1 U1.P$T2
PREVGH: D5.1 EPD_C9.2 J1.21
PREVGL: D2.2 EPD_C11.2 J1.23
RESE: J1.3 Q3.2 R1_EP_DR.2
RESET: J2.6 TP_RESET.TP U1.P$AC13
SCK/1.5B: J1.13
SCK/2.2D: U1.P$A12
SCL/1.4C: IC2.C1 U3.7
SCL/2.4C: IC1.B1 IC3.12 R4.1 R17.2 TP_SCL.TP U1.P$M2
SDA/1.4C: IC2.B2 U3.8
SDA/2.4C: IC1.C1 IC3.2 R2.1 R18.2 TP_SDA.TP U1.P$L1
SWDCLK: J2.4 TP_SWDCLK.TP U1.P$AA24
SWDIO: J2.2 TP_SWDIO.TP U1.P$AC24
SWO: TP_SWO.TP U1.P$AD22
VBAT/1.2A: C27.2 TP_VBAT.TP U3.2 U3.3
VBAT/2.5C: C37.2 IC1.C2
VBUS/1.5D: C42.1 C43.1 D3.5 J4.A4_B9 J4.A9_B4
VBUS/2.6D: C21.1 C38.2 IC1.A2 U1.P$AD2
VREG: C23.1 C24.2 C39.1 IC1.B2 IC9.A1 IC9.A2 IC9.A3 TP_VREG.TP

## Tracks (layer width: path | path; a pad name or v marks a point on that pad's centre or on a via)
3V3/1.7D  (via drill 0.35)
  Top 0.152: IC2.C2 22.27,6.14 22.53,5.89 C34.1 | 17.47,6.16 22.18,6.16 C34.1 | C34.1 20.36,5.81 19.92,5.37 19.92,4.93 20.25,4.6 R8.2 17.36,4.6 16.85,5.11 16.85,5.54 | C34.1 22.53,5.63 22.52,4.9 25.29,4.9 v25.35,4.34 | R5.2 15.45,6.16 R_PWR_EPD.2 16.85,5.54 | 16.85,5.54 17.47,6.16 | 17.47,6.16 17.43,6.2 DMG2305UX-7.2 | v37.54,4.7 36.52,4.7 35.61,5.61 R7.2
  Bottom 0.152: v37.54,4.7 37.49,4.64 32.92,4.39 32.08,5.43 30.5,5.46 29.84,4.59 29.59,4.34 v25.35,4.34
3V3/2.4A  (via drill 0.35)
  Top 0.152: C14.1 22.63,19.03 | 22.63,19.03 23.31,19.03 U1.P$B1 | 30.58,13 30.91,13 C8.1 30.99,11.96 30.96,11.93 31.34,11.55 32.46,11.55 C7.1 32.46,9.85 33.02,9.29 R18.1 35.18,9.29 | 30.58,13 U1.P$AD23 29.64,12.7 29.64,11.35 28.37,10.08 27.08,10.08 26.67,10.49 26.67,11.73 26.84,11.9 U1.P$AD14 | C33.1 29.26,5.74 29.23,5.76 29.23,6.4 | 29.23,6.4 29.23,7.06 | 29.23,7.06 29.26,7.08 30.26,7.08 C25.1 | 29.23,7.06 28.97,7.32 IC9.E3 IC9.E2 | 35.18,9.29 R17.1 | C19.1 17.42,14.27 IC3.10 17.98,13.71 18.49,13.71 | TP_3V3.TP 35.05,9.42 35.18,9.29 | TP_3V3.TP 35.05,13.99 35.58,14.53 | 35.58,14.53 36.42,15.36 J2.1 | TP_3.3V.TP 35.41,14.7 35.58,14.53 | 18.49,13.71 18.54,13.71 IC3.7 19.19,14.18 v19.79,14.78 | U1.P$Y2 23.59,14.5 U1.P$W1 23.27,14.58 C6.1 21.16,14.58 v21.13,14.6 | v29.21,6.4 29.23,6.4 | v33.81,10.94 34.97,12.11 TP_3V3.TP | v27.99,20.37 28.82,20.37 28.84,20.34 | v22.63,19.71 22.63,19.03 | C12.1 28.84,20.83 28.84,20.34 | 28.84,20.34 U1.P$A22 | IC3.3 18.51,13.69 18.49,13.71 | 30.58,13 31.44,13.87 v31.44,14.02
  Bottom 0.152: v33.81,10.94 33.68,10.82 27.41,10.82 24.18,7.59 24.18,6.57 24.51,6.24 24.51,5.69 24.84,5.36 25.73,5.36 26.69,6.32 26.69,7.08 28.52,7.08 v29.21,6.4 | v31.44,14.02 30.63,13.2 21.84,13.2 20.01,11.38 19.61,11.38 18.39,12.59 18.39,13.38 v19.79,14.78 19.96,14.6 v21.13,14.6 21.77,15.24 21.77,16.1 21.08,16.79 21.08,18.16 v22.63,19.71 24.15,21.23 27.3,21.23 27.99,20.54 v27.99,20.37
DN
  Top 0.152: J4.B7 29.86,27.04 29.7,26.89 29.01,26.89 28.86,27.04 J4.A7 28.86,26.89 27.7,25.03 25.86,25.03 21.93,21.81 20.54,21.81 20.35,22 20.35,22.93 19.04,24.24 D3.1
DP
  Top 0.152: J4.A6 29.36,28.34 29.2,28.5 28.51,28.5 28.36,28.34 J4.B6 28.36,26.97 27.89,26.5 27.89,25.92 27.62,25.48 24.04,25.43 23.92,25.56 21.69,28.79 18.67,28.79 17.5,27.76 17.61,22.87 18.44,22.34 D3.3
EPD_3V3  (via drill 0.35)
  Top 0.152: J1.16 J1.15 10.62,16.23 EPD_C5.2 12.86,17.56 v12.85,17.57 | C1-EP-DR.1 L5.1 15.07,32.5 16.59,30.98 16.59,18.25 16.16,17.81 16.16,17.47 16.11,17.52 v15.39,17.52 | v15.82,10.82 15.82,9.91 DMG2305UX-7.3
  Bottom 0.152: v15.39,17.52 15.34,17.57 15.34,17.88 14.58,18.64 13.92,18.64 v12.85,17.57 12.85,13.79 v15.82,10.82
GDR
  Top 0.152: R2_EP_DR.2 6.36,30.72 Q3.1 9.5,28.53 9.5,23.42 10.18,22.74 J1.2
GND  (via drill 0.35)
  Top 0.152: C2.2 31.27,23.55 30.87,23.13 | 30.87,23.13 X1.4 | C42.2 19.97,27.09 C43.2 20.55,27.67 20.55,28.34 18.79,28.34 17.91,27.45 17.91,23.69 18.31,23.29 D3.2 19.04,22.98 19.76,22.98 19.96,22.78 19.96,20.88 20.51,20.33 C14.2 17.79,20.33 17.04,19.58 17.04,18.74 17.2,18.59 C17.1 17.68,17.67 | 7.19,26.62 SJ1.1 2.64,26.49 1.45,26.49 1.42,26.51 1.42,29.13 2.76,30.47 R_TYPE_SEL.1 5.05,30.47 5.79,31.21 R2_EP_DR.1 8.92,33.83 10.01,33.83 10.01,33.57 C1-EP-DR.2 v11.1,33.3 | 7.19,26.62 7.96,25.85 J1.MP1 8.38,23.67 8.38,19.73 8.39,19.74 9.83,19.74 | 25.79,26.52 25.78,26.41 26.13,25.86 27.3,25.86 R2_USB.2 | 25.79,26.52 25.9,27.6 | 25.9,27.6 J4.A12_B1 | 31.42,26.04 32.21,26.82 32.21,27.59 J4.A1_B12 32.85,27.69 J4.SH3 J4.SH1 | 31.42,26.04 R1_USB.1 | J4.SH2 J4.SH4 25.46,27.6 25.9,27.6 | SW_UP.1 13.68,3.94 14.22,3.4 15.11,3.4 15.12,3.41 | C30.1 15.12,3.41 | R9.1 19.25,8.78 IC1.D2 | R9.1 19.93,9.42 C37.1 | v15.8,30.73 14.78,31.75 D4.1 | 9.83,19.74 J1.8 12.57,19.74 EPD_C1.1 EPD_C2.1 | 9.83,19.74 9.83,15.26 9.85,15.24 J1.17 | TP_BAT_GND.TP 5.22,7.78 8.33,7.78 | 8.33,7.78 EPD_C12.1 EPD_C11.1 11.55,7.78 v11.56,7.77 | 15.12,3.41 v18.44,3.41 19.63,3.41 C31.1 | TP_GND.TP 40.37,6.85 U3.4 40.5,8.76 41.25,8.76 41.35,8.86 U3.9 | U3.9 41.35,10.49 41.38,10.51 40.48,10.51 | 40.48,10.51 U3.1 39.05,10.4 38.85,10.2 C27.1 | U3.9 41.6,9.4 U3.6 | TP_GND.TP 41.68,5.53 41.68,2.54 40.54,1.39 38.9,1.39 C29.1 35.63,3.75 SW_DN.1 | C34.2 23.39,5.46 24.15,5.46 24.46,5.76 | C32.1 22.57,8.78 21.94,8.78 20.93,7.77 | 20.93,7.77 21.39,7.31 IC2.B1 22.01,7.07 22.05,7.06 22.5,7.06 IC2.B3 23.27,7.26 24.46,6.24 24.46,5.76
  Top 0.152: J2.5 J2.3 40.85,15.71 40.48,14.34 40.48,10.51 | IC9.B1 IC9.C1 IC9.C2 IC9.C3 28.59,8.05 31.19,8.05 31.54,7.78 C25.2 C33.2 31.29,5.44 v31.29,4.75 | C23.2 30.29,9.84 C24.1 29.41,9.14 v29.29,9.27 | TP_GND.TP v41.4,7.36 | 26.19,20.9 C13.2 27.58,21.36 C12.2 | 26.19,20.9 25.65,20.9 C16.2 C15.2 25.1,19.89 24.97,19.76 24.97,19.13 U1.P$B7 | 17.68,17.67 C18.2 v16.81,16.58 C19.2 | EPD_C10.1 EPD_C9.1 14.19,12.57 EPD_C8.1 EPD_C7.1 EPD_C6.1 EPD_C5.1 14.16,17.46 v14.15,17.47 | C38.1 16.79,10.81 16.79,11.55 16.92,11.68 R3.1 16.89,12.09 16.36,12.09 16.1,12.34 16.1,14.55 16.33,14.78 C19.2 | IC3.9 IC3.8 18.51,15.23 18.52,15.24 17.27,15.24 C19.2 | 7.19,26.62 7.24,26.67 v7.24,27.5 | R9.1 19.3,8.73 19.3,7.82 19.35,7.77 20.93,7.77 | C39.2 21.49,10.16 25.48,10.16 25.74,10.43 C21.2 25.74,11.64 v25.12,12.26 | C20.2 21.98,11.49 21.41,12.06 21.41,14.04 21.44,14.07 C6.2 22.83,14.07 v23.06,13.84 23.29,14.07 23.52,14.07 23.57,14.02 24.36,14.02 U1.P$87 | C7.2 32.97,12.26 32.31,12.92 32.18,12.92 | 32.18,12.92 C8.2 | C11.2 31.22,19.73 v31.53,20.05 31.8,20.32 C1.2 31.8,20.95 32.25,21.39 X1.2 32.02,21.98 30.87,23.13 | C4.2 C22.2 35.58,22.55 35.58,20.95 C9.2 31.11,16.18 v30.5,15.57 | U1.P$F23 29.37,17.73 30.05,17.73 30.15,17.83 30.94,17.83 C10.2 31.34,17.9 33.79,20.35 | 33.79,20.35 C3.2 | 24.46,5.76 24.74,5.48 25.83,5.48 | 25.83,5.48 26.11,5.2 26.11,4.01 25.75,3.65 24.72,3.65 SW_ENT.1 | 25.83,5.48 26.47,6.12 v27.81,6.12 | 17.68,17.67 20.98,17.67 C5.2 | v33.58,21.03 33.79,20.81 33.79,20.35 | v26.14,20.29 26.14,20.85 26.19,20.9 | v33.58,25.42 32.96,26.04 31.42,26.04 | v24.46,26.18 24.79,26.52 25.79,26.52
  Top 0.152: 32.18,12.92 32.18,15.21 33.91,16.94 v35.41,16.94 | U1.P$74 U1.P$84 | J1.MP2 8.33,10.57 8.33,7.78
  Bottom 0.152: v11.1,33.3 13.21,33.3 v15.8,30.73 | 25.99,15.59 U1.P$88 U1.P$87 24.18,13.84 v23.06,13.84 | 25.99,15.59 U1.P$84 U1.P$80 | U1.P$80 U1.P$79 | U1.P$80 U1.P$76 U1.P$75 24.79,18.95 v26.14,20.29 | U1.P$80 U1.P$81 | U1.P$81 U1.P$77 U1.P$78 U1.P$82 | U1.P$81 U1.P$85 | U1.P$85 U1.P$86 28.48,15.57 v30.5,15.57 31.18,16.24 | U1.P$85 U1.P$89 U1.P$90 | v41.4,7.36 39.81,5.77 | 39.81,5.77 37.69,3.65 31.29,3.65 | 31.29,3.65 22.78,3.65 22.55,3.43 22.55,3.41 v18.44,3.41 7.79,3.41 7.59,3.6 7.59,6.32 9.04,7.77 v11.56,7.77 13.87,7.77 16.66,10.56 16.66,11.15 14.96,12.85 14.96,15.69 | v14.15,17.47 14.96,16.66 14.96,15.69 | v7.24,27.5 15.58,19.16 | 15.58,19.16 16.28,18.46 16.28,17.14 | 16.28,17.14 16.28,17.01 14.96,15.69 | 16.28,17.14 16.84,17.14 16.84,16.61 v16.81,16.58 | v29.29,9.27 37.57,9.27 39.81,7.02 39.81,6.3 | 39.81,6.3 39.81,5.77 | v31.29,4.75 31.29,3.65 | 39.81,6.3 30.71,6.27 29.72,5.28 29.16,5.3 28.62,5.3 v27.81,6.12 | 31.53,16.71 v31.53,20.05 32.6,20.05 v33.58,21.03 v33.58,25.42 26.08,25.42 22.83,22.17 21.94,22.17 21.79,22.32 21.79,22.63 | 31.53,16.71 31.53,16.6 31.18,16.24 | 21.79,22.63 21.79,24.69 23.29,26.18 v24.46,26.18 | v25.12,12.26 25.75,12.9 31.37,12.9 32.56,14.09 32.56,14.86 31.18,16.24 | 21.79,22.63 18.32,19.16 15.58,19.16 | v35.41,16.94 31.76,16.94 31.53,16.71 | U1.P$83 25.93,15.65 25.99,15.59
JJ
  Top 0.152: U1.P$B5 C15.1 C16.1 24.59,21.64 25.11,22.17 27.48,22.17 27.71,22.39 27.71,23.26 27.23,23.74 | 27.23,23.74 28.52,25.03 31.71,25.03 32.95,23.78 32.95,20.25 31.11,18.41 C10.1 30.88,18.28 30.12,18.28 U1.P$E24 | 27.23,23.74 L3.2
LX1
  Top 0.152: IC9.B2 IC9.B3 28.57,8.52 28.81,8.38 31.48,8.38 32.16,7.6 32.16,4.76 30.35,2.94 28.38,2.94 L7.1
LX2
  Top 0.152: IC9.D2 IC9.D3 28.5,7.74 30.73,7.74 30.86,7.6 30.86,5.19 29.99,4.31 L7.2
N$1
  Top 0.152: R9.2 18.72,9.56 IC1.D1
N$2
  Top 0.152: R4.2 IC9.D1
N$3
  Top 0.152: IC9.E1 27.05,6.68 R2.2
N$4
  Top 0.152: IC3.1 17.51,12.61 17.5,12.62 R3.2
N$5
  Top 0.152: C20.1 22.51,13.2 23.54,13.2 23.74,13.4 24.46,13.4 24.49,13.4 U1.P$AC5
N$6
  Top 0.152: U1.P$F2 23.76,17.83 22.33,17.83 21.67,17.17 20.25,17.17 X2.1 17.77,16.17 C18.1
N$7
  Top 0.152: C17.2 18.82,19.1 X2.2 20.26,19.68 21.87,19.68 22.02,19.83 22.02,20.21 22.17,20.37 23.06,20.37 23.72,19.71 23.72,18.38 U1.P$D2
N$8
  Top 0.152: C5.1 21.56,17.83 22.24,18.5 U1.P$C1
N$9
  Top 0.152: C9.1 29.86,16.02 U1.P$N24
N$10
  Top 0.152: L2.1 25.18,22.74 24.21,21.76 24.21,19.12 U1.P$B3
N$11
  Top 0.152: L3.1 26.88,22.74 25.88,23.74 L2.2
N$12
  Top 0.152: U1.P$H23 29.51,17.42 31.53,17.42 34.82,20.71 34.82,20.93 C3.1 34.85,20.95 34.85,21.38 34.21,21.38 34.21,21.57 L1.1
N$13
  Top 0.152: ANT1.1 39.62,28.4 34.97,23.75 C22.1 C4.1 33.86,23.69 33.32,23.69 33.32,22.68 33.43,22.58 34.39,22.58 34.87,22.1 L1.2
N$14
  Top 0.152: C11.1 30.71,19.12 30.18,18.6 29.69,18.6 U1.P$D23
N$15
  Top 0.152: 31.78,23.55 C2.1 31.78,24.46 31.51,24.72 31.03,24.72 29.57,23.26 U1.P$A23 | 31.78,23.55 32.2,23.13 X1.3 31.78,23.55
N$16
  Top 0.152: X1.1 30.8,21.45 31.29,20.95 C1.1 31.29,20.8 29.82,20.37 U1.P$B24
N$18
  Top 0.152: C2-EP-DR.1 10.23,29 11.05,29.82 D2.1 11.03,30.1 D4.2
N$19
  Top 0.152: R_TYPE_SEL.2 3.02,29.92 2.77,29.67 2.77,29.38 4.01,29.38 | SJ1.2 4.01,29.38 | 4.01,29.38 4.04,29.38 R1_EP_DR.1
N$20
  Top 0.152: D5.2 11.1,27.63 10.24,28.49 C2-EP-DR.2 9.98,28.49 9.41,29.06 Q3.3 9.41,31.43 L5.2
N$22
  Top 0.152: C13.1 27.86,19.52 U1.P$A18
N$23
  Top 0.152: C32.2 22.97,8.63 22.27,7.94 IC2.A2
N$24
  Top 0.152: EPD_C2.2 12.12,21.74 J1.4
N$25
  Top 0.152: EPD_C1.2 10.66,21.18 J1.5
N$28
  Top 0.152: EPD_C6.2 10.7,14.83 J1.18
N$29
  Top 0.152: EPD_C7.2 11.63,13.71 11.11,14.24 J1.19
N$30
  Top 0.152: EPD_C8.2 12.25,12.59 11.11,13.74 J1.20
N$31
  Top 0.152: R1_USB.2 J4.A5
N$32
  Top 0.152: EPD_C10.2 12.46,10.11 11.76,10.85 11.76,12.06 11.03,12.74 J1.22
N$34
  Top 0.152: EPD_C12.2 9.22,10.55 10.41,11.74 J1.24
N$35
  Top 0.152: R2_USB.1 J4.B5
OUT+
  Top 0.152: TP_OP.TP 22.83,7.87 IC2.A3
OUT-  (via drill 0.35)
  Top 0.152: TP_ON.TP v9.32,5.25 | v23.72,6.07 22.85,6.81 IC2.C3
  Bottom 0.152: v9.32,5.25 23.39,5.25 v23.72,6.07
P0.13/1.5D
  Top 0.152: R5.1 14.65,5.61 14.4,5.36 14.4,4.31 C30.2 13.84,4.87 10.92,4.87 10.61,4.56 SW_UP.2
P0.14/1.5D
  Top 0.152: SW_ENT.2 20.56,3.96 C31.2 20.72,4.13 20.72,4.9 20.48,5.15 R8.1
P1.01/1.6C
  Top 0.152: R_PWR_EPD.1 15.53,6.94 DMG2305UX-7.1
P1.02/1.6C
  Top 0.152: SW_DN.2 32.61,4.59 33.08,5.06 R7.1 35.61,5.06 C29.2
PMIC_INT
  Top 0.152: IC1.A1 18.85,11.3 19.3,11.76 20.55,11.76 20.52,12.92 20.52,15.21 21.76,15.25 U1.P$T2
PREVGH
  Top 0.152: J1.21 11.03,13.24 12.76,11.51 EPD_C9.2 12.89,11.27 13.54,11.92 13.54,19.51 14.78,20.75 D5.1
PREVGL
  Top 0.152: J1.23 11.03,12.24 11.19,12.09 11.19,9.68 10.59,9.08 EPD_C11.2 14.28,9.08 14.77,9.56 14.77,16.93 14.77,17.53 14.77,19.48 15.58,20.95 15.58,29.21 14.98,29.82 D2.2
RESE
  Top 0.152: R1_EP_DR.2 4.63,29.42 Q3.2 7.58,29.42 8.97,28.03 8.97,23.44 10.18,22.24 J1.3
RESET  (via drill 0.35)
  Top 0.152: J2.6 43.34,18.48 43.71,19.02 TP_RESET.TP 43.61,24.1 v43.64,25.5 | v26.08,12.29 26.08,13.12 U1.P$AC13
  Bottom 0.152: v43.64,25.5 39.93,25.5 36.65,22.22 36.63,16.25 32.69,12.32 v26.08,12.29
SCL/1.4C  (via drill 0.35)
  Top 0.152: v20.14,6.78 21.74,6.78 IC2.C1 | v43.36,7.54 43.36,9.88 43.34,9.9 U3.7
  Bottom 0.152: v20.14,6.78 23.7,10.33 26.36,10.33 27.28,11.25 33.15,11.25 33.5,11.6 34.11,11.6 35.38,10.33 40.56,10.33 v43.36,7.54
SCL/2.4C  (via drill 0.35)
  Top 0.152: R17.2 36.96,8.69 TP_SCL.TP 37.62,7.62 37.62,9.72 37.18,9.72 36.55,10.36 36.55,13.23 v36.32,13.46 | R4.1 26.19,8.27 25.2,9.46 21.57,9.48 20.98,8.89 v20.29,8.5 | IC1.B1 18.19,10.84 v18.13,11.55 | U1.P$M2 23.82,16.23 23.09,16.23 22.73,15.87 v21,15.87 | IC3.12 16.94,13.15 v16.71,13.38
  Bottom 0.152: v36.32,13.46 34.72,13.46 32.92,11.65 27.08,11.65 26.36,10.94 24.56,10.94 24.56,11.53 23.67,12.42 22.76,12.42 20.29,9.95 v20.29,8.5 18.19,10.6 v18.13,11.55 18.19,11.91 v16.71,13.38 19.2,15.87 v21,15.87
SDA/1.4C  (via drill 0.35)
  Top 0.152: IC2.B2 22.53,7.59 23.39,7.59 v25.12,6.09 | U3.8 44.18,10.4 44.5,10.08 44.5,7.62 v44.45,7.57
  Bottom 0.152: v25.12,6.09 24.54,6.68 24.54,7.24 27.2,9.9 40.08,9.9 42.37,7.62 42.37,6.7 42.7,6.37 44.04,6.37 44.45,6.78 v44.45,7.57
SDA/2.4C  (via drill 0.35)
  Top 0.152: R18.2 34.26,8.69 TP_SDA.TP 34.7,7.44 v35.86,8.61 | R2.1 25.58,7.21 v25.42,6.96 | 18.26,10.05 18.82,10.05 IC1.C1 | 18.26,10.05 18.06,10.05 17.52,10.59 17.52,11.83 17.93,12.19 | 17.93,12.19 18.01,12.32 IC3.2 | 17.93,12.19 19.56,12.19 v19.84,12.52 | U1.P$L1 23.19,16.66 v22.3,16.66 | 18.26,10.05 18.26,7.59 v18.77,7.08
  Bottom 0.152: v25.42,6.96 26.1,7.65 | 26.1,7.65 27.05,8.61 v35.86,8.61 | v19.84,12.52 21.08,13.76 21.15,13.76 22.3,14.91 v22.3,16.66 | v18.77,7.08 17.86,6.17 8.81,6.17 8.53,5.89 8.53,4.49 8.76,4.21 23.44,4.21 24.18,4.95 26.82,4.95 27.18,5.3 27.18,6.75 28.14,6.75 28.52,6.37 28.52,6.02 28.8,5.74 29.62,5.74 30,6.12 30,6.65 29.18,7.69 26.29,7.69 26.1,7.65
SWDCLK
  Top 0.152: J2.4 40.61,18.78 40.56,22.83 41.17,23.44 | U1.P$AA24 36.3,20.46 36.3,23.34 37.72,24.76 39.85,24.76 41.17,23.44 | 41.17,23.44 TP_SWDCLK.TP
SWDIO
  Top 0.152: TP_SWDIO.TP 36.65,22.29 36.65,20.16 | 36.65,20.16 U1.P$AC24 | J2.2 39.57,16.63 39.45,16.56 36.68,16.56 36.65,16.73 36.65,20.16
SWO
  Top 0.152: TP_SWO.TP 28.02,12.17 U1.P$AD22
VBAT/1.2A
  Top 0.152: TP_VBAT.TP 39.22,3.75 C27.2 40.28,9.32 U3.3 U3.2
VBAT/2.5C
  Top 0.152: C37.2 20.88,9.6 20.48,10 19.43,10 19.35,10.08 IC1.C2
VBUS/1.5D  (via drill 0.35)
  Top 0.152: J4.A4_B9 31.51,28.69 31.06,29.13 27.63,29.13 26.71,28.2 J4.A9_B4 26.64,27.63 v26.64,26.49 | C43.1 19.21,27.53 19.6,27.14 C42.1 19.6,25.33 20.04,24.89 22.22,24.89 22.78,24.33 v22.78,23.47 22.6,23.29 D3.5
  Bottom 0.152: v22.78,23.47 25.81,26.49 v26.64,26.49
VBUS/2.6D  (via drill 0.35)
  Top 0.152: U1.P$AD2 24.39,12.46 24.39,12.06 | IC1.A2 19.37,11.35 21.27,11.35 21.31,11.32 21.31,10.82 21.65,10.48 24.05,10.48 C21.1 24.44,12.01 24.39,12.06 | C38.2 17.18,9.74 v17.55,9.5 | v23.09,11.78 23.37,12.06 24.39,12.06
  Bottom 0.152: v17.55,9.5 18.41,9.39 20.32,7.49 20.4,7.49 23.09,10.18 v23.09,11.78
VREG
  Top 0.152: IC1.B2 20.37,10.48 20.36,10.61 | 31.59,10.16 C24.2 32.82,7.76 32.82,6.3 33.15,5.97 35.76,5.97 36.37,5.36 37.29,5.36 38.63,6.7 38.63,7.46 38.1,8 TP_VREG.TP | 31.59,10.16 31.59,11 31.55,11.05 29.79,11.05 28.49,9.74 IC9.A3 IC9.A2 IC9.A1 26.17,8.92 25.25,9.85 21.11,9.85 20.36,10.61 | C23.1 31.54,10.21 31.59,10.16 | 20.36,10.61 C39.1
(copper drawn outside any net)
  shapes: Bottom area x1